# Altium PCB agzu.PcbDoc
Units mm, origin at the board's own origin, x right, y up, seen from the top; angles counter-clockwise.
Board outline 54 x 58 mm, 2 copper layers (Top Layer, Bottom Layer); 13 components, 9 nets, 52 pads, 3 vias.
Unrouted connection lines stored in the file: 2.
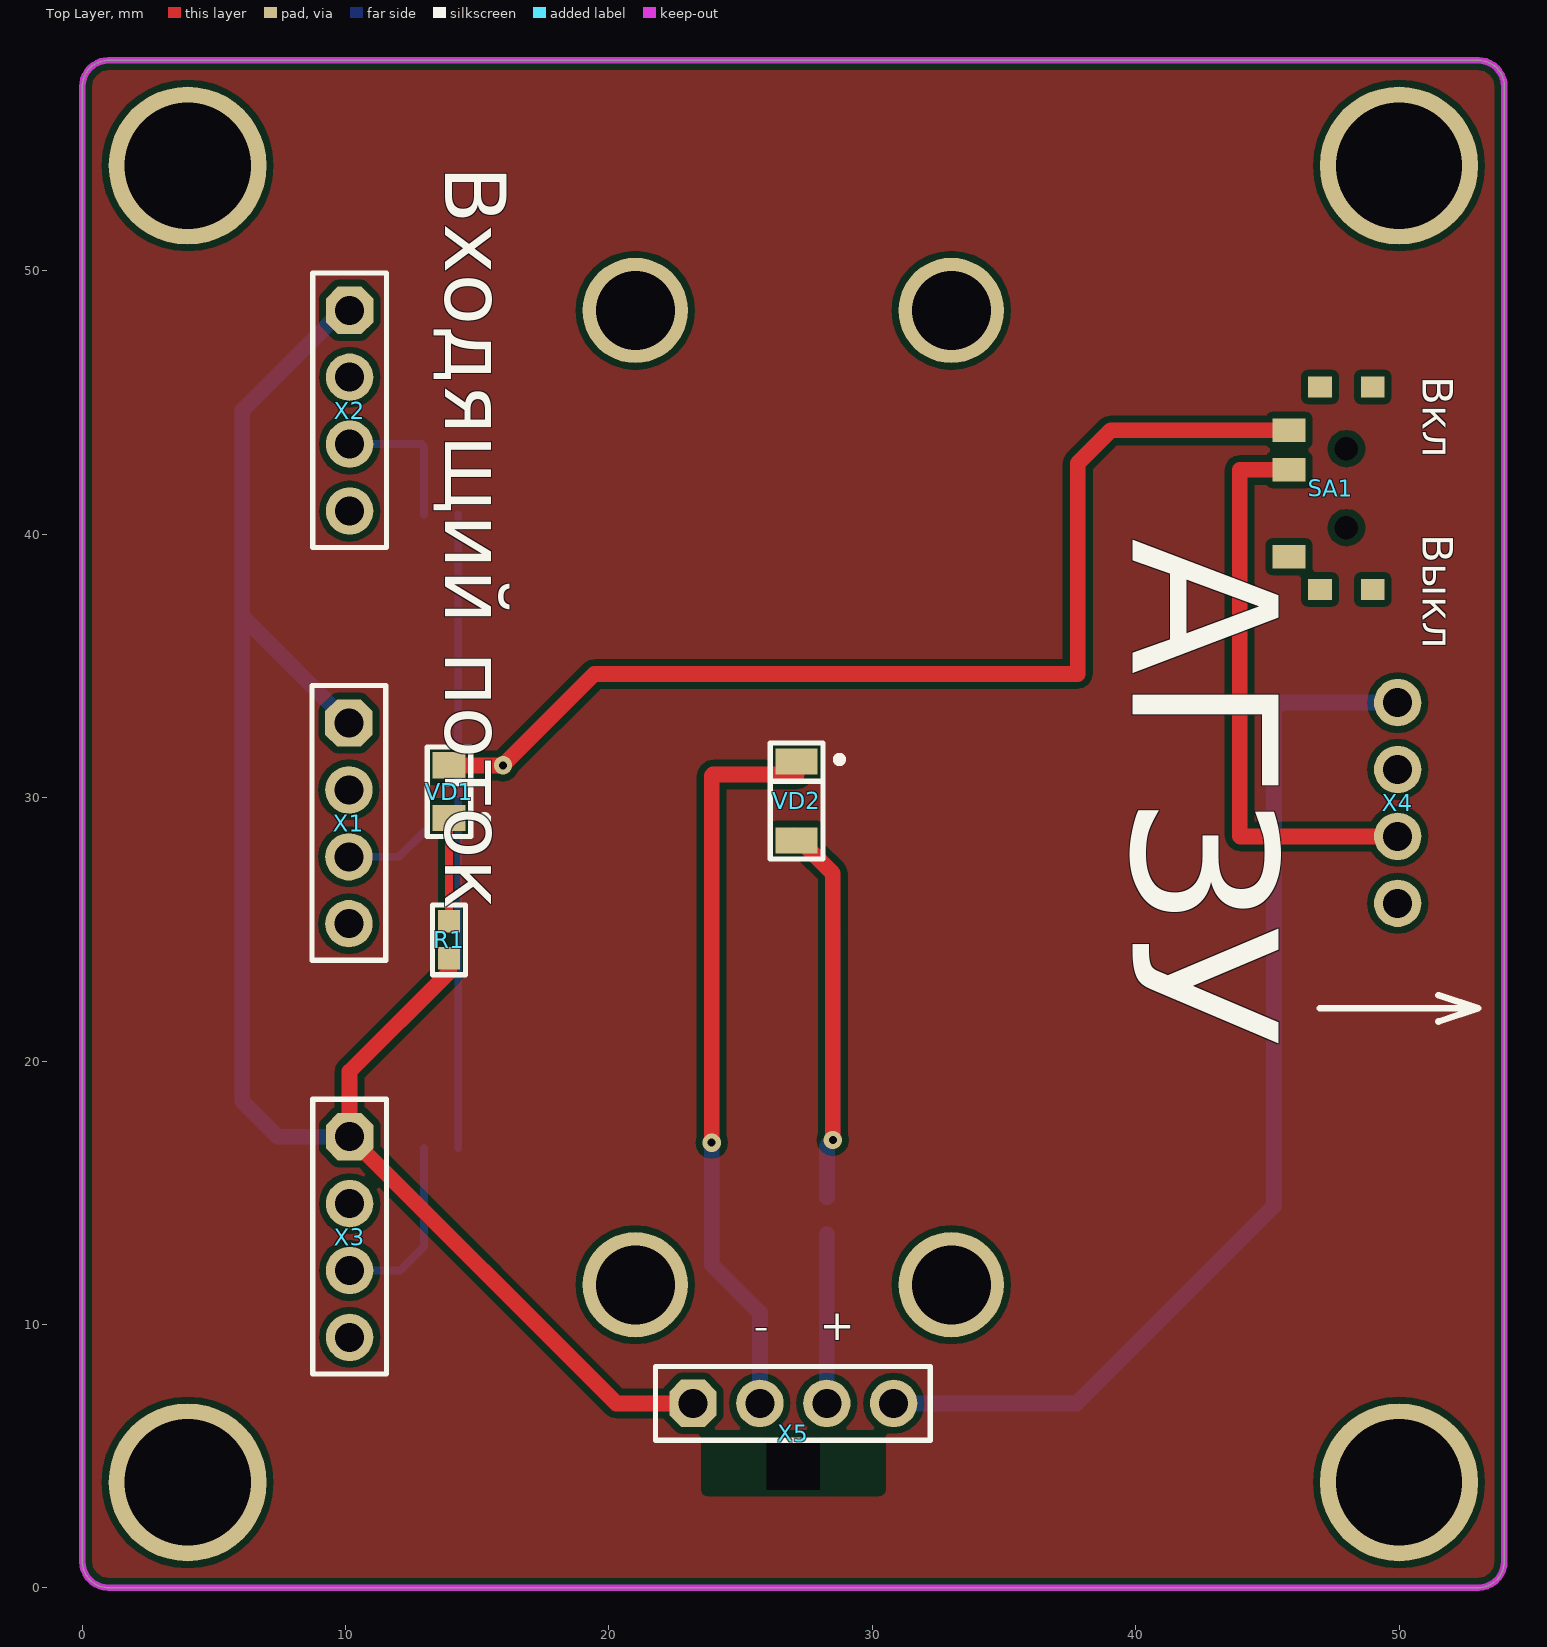
[diagram p0: Top Layer view]
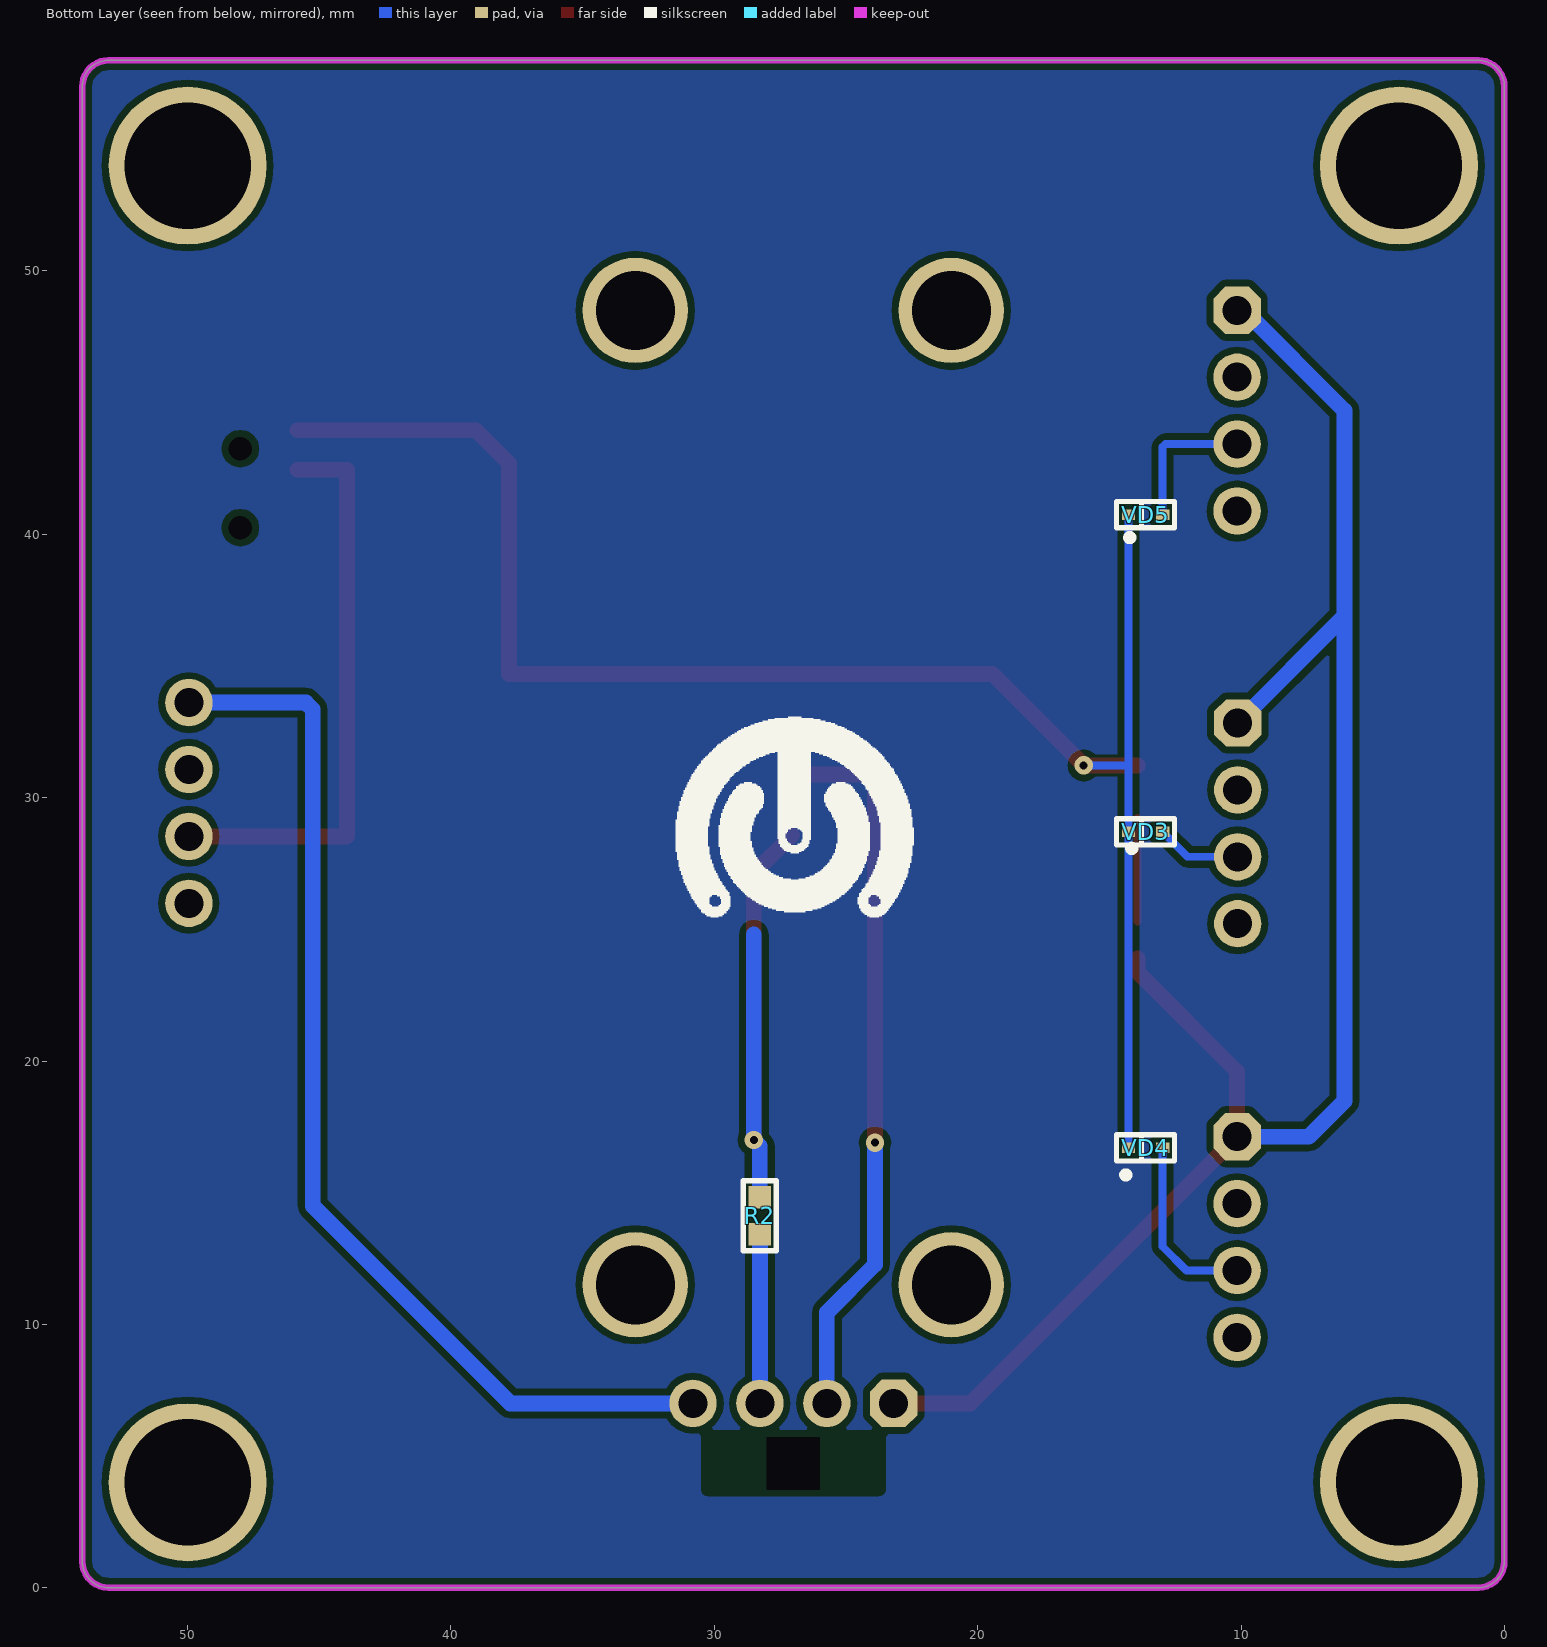
[diagram p1: Bottom Layer view, seen from below]

## Layer stack, top to bottom
Top Solder: solder mask 0.0102, Solder Resist, Dk 3.5
Top Layer: signal copper 0.0356
Dielectric 1: dielectric 0.32, FR-4, Dk 4.8
Bottom Layer: signal copper 0.0356
Bottom Solder: solder mask 0.0102, Solder Resist, Dk 3.5

## Board outline
0,1 ccw(c1,1) 1,0 53,0 ccw(c53,1) 54,1 54,57 ccw(c53,57) 53,58 1,58 ccw(c1,57) 0,57

## Design rules (kind name [scope] priority, off if disabled: settings)
Clearance [All] p1: gap=0.25 ignorepadtopadclearanceinfootprint=FALSE
PolygonConnect [All] p1: connectstyle=Relief reliefconductorwidth=0.254 reliefentries=4 polygonreliefangle="90 Angle" airgapwidth=0.254
RoutingVias [All] p1: holewidth=0.711 width=1.27 viastyle="Through Hole" minholewidth=0.711 minwidth=1.27 maxholewidth=0.711 maxwidth=1.27
SolderMaskExpansion [All] p1: expansion=0.102
Width [All] p1: maxlimit=10 minlimit=0.254 preferedwidth=0.254 minimp=50.000000 maximp=50.000000 favimp=50.000000
30 further rules are at their usual default settings.

## Components (designator, comment, footprint, x,y, rotation, side; value= is the part's Value field where it differs from the comment)
R1 "Resistor film, 100R, ±5%, 0603, 0.1W, -55...+125°C" "RES: 0603" 13.925,24.6 r90 top value=100R
R2 "Resistor film, 100R, ±5%, 0603, 0.1W, -55...+125°C" "RES: 0603" 28.275,14.125 r270 bottom value=100R
SA1 "SS-3292S-L1" SS-3292S-L1 48,41.726 r0 top
VD1 "LED, *, *, *, -55...+150°C" "LED: 0805G" 13.925,30.225 r270 top
VD2 "LED, *, *, *, -55...+150°C" "LED: 1206R" 27.125,29.875 r90 top
VD3 "Schottky diode, 80V, 500mA, 1V, 15pF, SOD-123, -55...+150°C" "DIODE: SOD523" 12.975,28.7 r0 bottom
VD4 "Schottky diode, 80V, 500mA, 1V, 15pF, SOD-123, -55...+150°C" "DIODE: SOD523" 12.975,16.7 r0 bottom
VD5 "Schottky diode, 80V, 500mA, 1V, 15pF, SOD-123, -55...+150°C" "DIODE: SOD523" 12.975,40.75 r0 bottom
X1 "Connector, 4pin, 2.54mm, 500VAC, 3A" "CON: PBS-4 R" 10.125,29.025 r270 top
X2 "Connector, 4pin, 2.54mm, 500VAC, 3A" "CON: PBS-4 R" 10.15,44.695 r270 top
X3 "Connector, 4pin, 2.54mm, 500VAC, 3A" "CON: PBS-4 R" 10.15,13.315 r270 top
X4 "Connector, 4pin, 2.54mm, 500VAC, 3A" "4PLS RIGHT ANGLE 2" 49.95,29.8 r270 top
X5 "PBS-4 cut" "PBS-4 CUT" 27,7 r0 top

## Footprints (in the part's own frame and the unit in brackets; to place one, negate y for a bottom-side part, rotate by r counter-clockwise, add the part's x,y. Pads: shape width x height; smd on the part's side, far side on the other; paste and mask are expansions set on the pad)
"4PLS RIGHT ANGLE 2" [mm]
  round 1.8 hole 1.1: 1(-3.81,0) 2(-1.27,0) 3(1.27,0) 4(3.81,0)
  body extent -5.04,-0.32 5.14,10.04, height 2.57
"CON: PBS-4 R" [mm] "PBS-5"
  oct 1.8x1.8 hole 1.1: 1(-3.81,0)
  round 1.8 hole 1.1: 2(-1.27,0) 3(1.27,0) 4(3.81,0)
  silkscreen extent -5.23,-1.4 5.2,1.4, body extent -5.08,-10.2 5.08,0, height 2.54
"DIODE: SOD523" [mm]
  rect 0.5x0.4 smd: 1(0,0) 2(1.3,0)
  silkscreen extent -0.45,-0.5 1.75,0.5, body extent -0.17,-0.4 1.48,0.4, height 0.65
"LED: 0805G" [mm]
  rect 1x1.25 smd: 1(-1,0) 2(1,0)
  silkscreen extent -1.7,-0.82 1.7,0.82, body extent -1.05,-0.67 1.05,0.68, height 0.9
"LED: 1206R" [mm]
  rect 1x1.6 smd: 1(-1.5,0) 2(1.5,0)
  silkscreen extent -2.2,-1 2.2,1, body extent -1.6,-0.8 1.6,0.8, height 1.1
"PBS-4 CUT" [mm]
  oct 1.8x1.8 hole 1.1: 1(-3.81,0)
  round 1.8 hole 1.1: 2(-1.27,0) 3(1.27,0) 4(3.81,0)
  rrect50% 0x0 hole 2 square: ""(0,-2.28)
  silkscreen extent -5.23,-1.4 5.2,1.4, body extent -5.08,-1.27 5.08,1.27, height 8.4
"RES: 0603" [mm]
  rect 0.85x0.85 smd: 1(-0.7,0) 2(0.7,0)
  silkscreen extent -1.33,-0.63 1.33,0.63, body extent -0.8,-0.4 0.8,0.4, height 0.44
SS-3292S-L1 [mm]
  rect 1.25x0.9 smd: 1(-2.175,-2.576) 2(-2.175,0.724) 3(-2.175,2.224)
  rect 0.9x0.8 smd: ""(-1,-3.826) ""(-1,3.874) ""(1,-3.826) ""(1,3.874)
  round 0 hole 0.9 unplated: ""(0,-1.476) ""(0,1.524)
  body extent -1.52,-4.32 1.52,4.44, height 6

## Part data
R1 R2: library part Resistor_0603, Manufacturer=Yageo, Package=0603, PartNumber=RC0603JR-07100RL, Power=0.1W, Temperature=-55...+125°C, Tolerance=±5%, TypeResistor="Resistor film", HelpURL=https://www.digikey.com/product-detail/en/yageo/RC0603JR-07100RL/311-100GRCT-ND/729644, ValueManufacturerPartNumber="Resistor film, 100R, ±5%, 0603, 0.1W, -55...+125°C"
VD1 VD2: library part LED_single, Color=GREEN, Temperature=-55...+150°C, TypeDiode=LED, ValueManufacturerPartNumber="LED, *, *, *, -55...+150°C"
VD3 VD4 VD5: library part Schottky_single, Current=500mA, Manufacturer="Diodes Incorporated", Package=SOD-123, PartNumber=MBR0580S1-7, Temperature=-55...+150°C, Voltage=80V, VoltageDrop=1V, HelpURL=https://www.digikey.com/product-detail/en/diodes-incorporated/MBR0580S1-7/MBR0580S1-7DICT-ND/5080371, RecoveryTime=15pF, TypeDiode="Schottky diode", ValueManufacturerPartNumber="Schottky diode, 80V, 500mA, 1V, 15pF, SOD-123, -55...+150°C"
X1 X2 X3: library part PBS-4, CurrentMax=3A, Manufacturer=Connfly, VoltageMax=500VAC, CommentText="\"Разъем\"", HelpURL=https://www.chipdip.ru/product/pbs-4, Multichannel=4pin, PartNumber=PBS-4, Pitch=2.54mm, TypeConnector=Connector, ValueManufacturerPartNumber="Connector, 4pin, 2.54mm, 500VAC, 3A"
X4: library part PLS-4, CurrentMax=3A, Manufacturer=Connfly, VoltageMax=500VAC, CommentText="\"Разъем\"", HelpURL=https://www.chipdip.ru/product/pls-4, Multichannel=4pin, PartNumber=PLS-4, Pitch=2.54mm, TypeConnector=Connector, ValueManufacturerPartNumber="Connector, 4pin, 2.54mm, 500VAC, 3A"

## Free pads (board coordinates)
  round 6 hole 4.8: ""(4,4) ""(4,54) ""(50,4) ""(50,54)
  round 4 hole 3: ""(21,11.5) ""(21,48.5) ""(33,11.5) ""(33,48.5)

## Via types
v1: diameter 0.7, hole 0.3, Top Layer to Bottom Layer, 3 vias

## Nets (pads, with @x,y where several pads share a name; then routed paths per layer and width w, separated by ;. In a path a pad name is that pad's centre, name@x,y a point inside that pad or via, vN(x,y) a via of type N, cw(c..) or ccw(c..) an arc to the next point about the centre after c; other vN are vias at no path point)
GND: R1.1 VD2.2 X1.1 X2.1 X3.1 X4.1 X5.1 X5.2 X5.4 | length 136.8
  Top Layer w0.6: R1.1 13.925,23.375 10.15,19.6 X3.1 20.275,7 X5.1 ; v1(23.9,16.9) 23.9,30.825 23.95,30.875 VD2.2@27.125,30.875
  Bottom Layer w0.6: X1.1 6.075,36.885 ; X3.1 7.425,17.125 6.075,18.475 6.075,36.885 ; X2.1 9.88,48.505 6.075,44.7 6.075,36.885 ; v1(23.9,16.9) 23.9,12.275 25.73,10.445 X5.2 ; X5.4 37.75,7 45.25,14.5 45.25,33.35 45.51,33.61 X4.1
NetR1_2: R1.2 VD1.2 | length 3.9
  Top Layer w0.3: R1.2 VD1.2
NetR2_1: R2.1 VD2.1 | length 22.2
  Top Layer w0.6: VD2.1@27.05,28.575 28.5,27.125 v1(28.5,17)
  Bottom Layer w0.6: R2.1 28.275,16.775 v1(28.5,17) 28.5,24.8
NetSA1_2: SA1.2 X4.3 | length 21.8
  Top Layer w0.6: SA1.2 43.95,42.45 43.95,28.55 43.97,28.53 X4.3
NetSA1_3: SA1.3 VD1.1 VD3.2 VD4.2 VD5.2 | length 67.6
  Top Layer w0.6: VD1.1 v1(15.975,31.225) 19.45,34.7 37.8,34.7 37.8,42.7 39.05,43.95 SA1.3
  Bottom Layer w0.3: VD4.2 VD3.2 14.275,31.2 ; VD5.2 14.275,31.2 ; v1(15.975,31.225) 14.3,31.225 14.275,31.2
NetVD3_1: VD3.1 X1.3 | length 3.2
  Bottom Layer w0.3: X1.3 12.03,27.755 VD3.1
NetVD4_1: VD4.1 X3.3 | length 6.9
  Bottom Layer w0.3: X3.3 12.07,12.045 12.975,12.95 VD4.1
NetVD5_1: VD5.1 X2.3 | length 5.4
  Bottom Layer w0.3: X2.3 12.875,43.425 12.975,43.325 VD5.1
VCC: R2.2 X5.3 | length 6.4
  Bottom Layer w0.6: X5.3 28.27,13.42 R2.2
pads on no net: SA1. SA1.1 X1.2 X1.4 X2.2 X2.4 X3.2 X3.4 X4.2 X4.4 X5.

## Polygon pours and split planes (outlines as drawn)
no net on Top Layer "Top Layer-No Net" (solid, pour order 2): 0,1 ccw(c1,1) 1,0 53,0 ccw(c53,1) 54,1 54,57 ccw(c53,57) 53,58 1,58 ccw(c1,57) 0,57
no net on Bottom Layer "Top Layer-No Net1" (solid, pour order 3): 0,1 ccw(c1,1) 1,0 53,0 ccw(c53,1) 54,1 54,57 ccw(c53,57) 53,58 1,58 ccw(c1,57) 0,57

## Keep-outs
Keep-Out Layer:
  the board outline again, w0.254

## Silkscreen, mask and mechanical layers (free items; w line width, h text height)
Top Overlay:
  circle w0.254: c28.75,31.45 r0.125
  circle w0.254: c15.275,29.2 r0.125
  lines w0.254: 47,22 53,22 ; 51.5,22.5 53,22 ; 53,22 51.5,21.5 53,22
  text "Входящий поток" at 13,54 h4 r270
  text "Вкл" at 50.5,46 h2 r270
  text "Выкл" at 50.5,40 h2 r270
  text "АГЗУ" at 37.025,39.85 h15 r270
  text "-" at 25.5,9 h2
  text "+" at 28,9 h2
Bottom Overlay:
  drawing of 379 lines, arcs and shapes, not listed